# Altium PCB PCB1.PcbDoc (part 2 of 2)
Units mm, origin at the board's own origin, x right, y up, seen from the top; angles counter-clockwise.
Board outline 42.67 x 97.28 mm, 2 copper layers (Top Layer, Bottom Layer); 89 components, 66 nets, 314 pads, 101 vias.
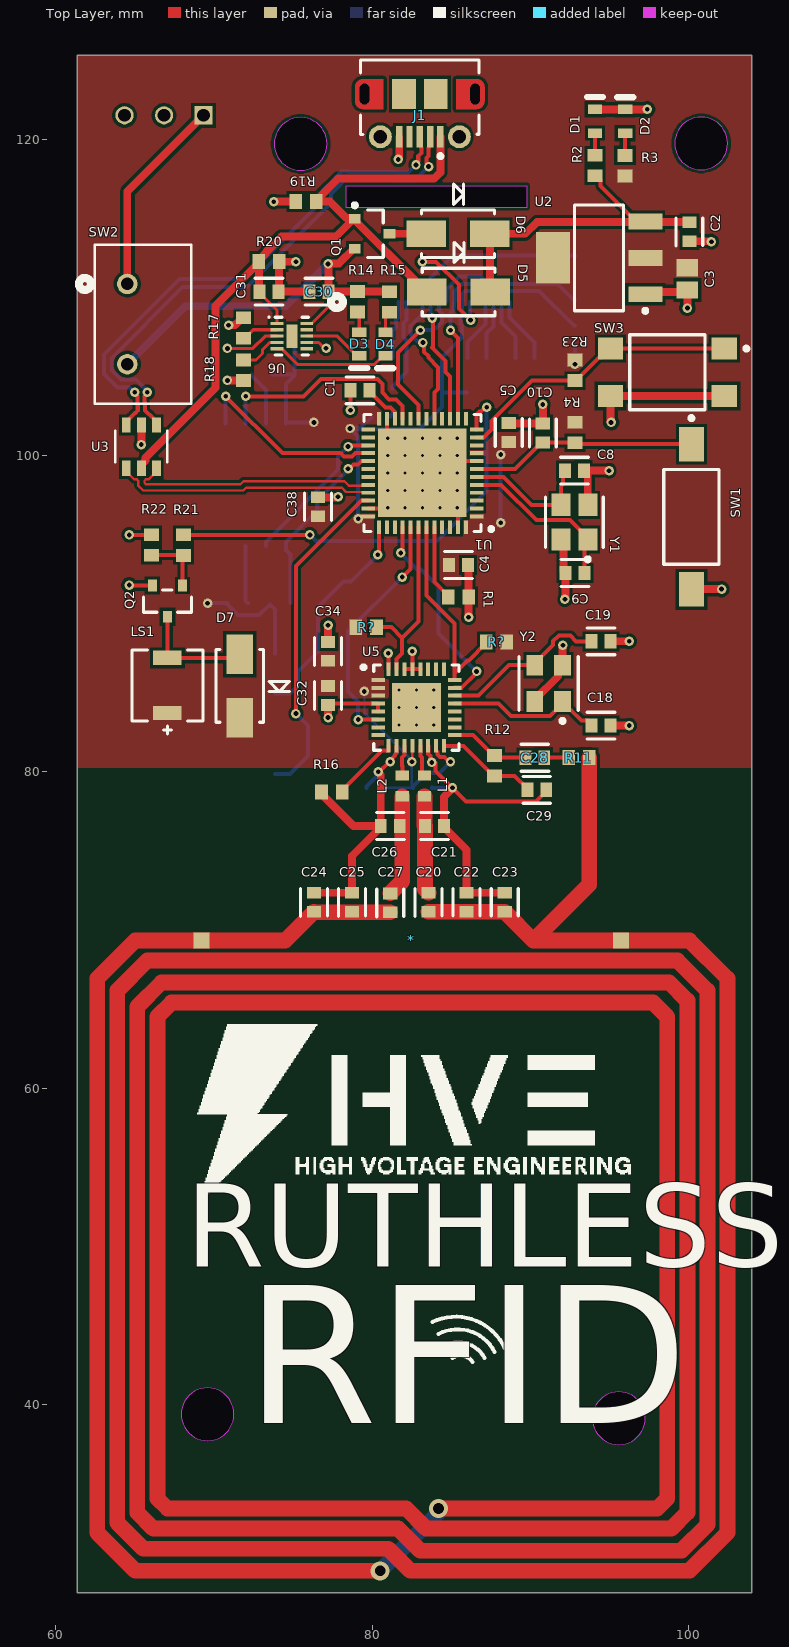
[diagram p0: Top Layer view]

## Polygon pours and split planes (outlines as drawn)
GND on Bottom Layer "GND_L02_P001" (solid, pour order 1): 61.341,80.264 61.341,125.349 104.013,125.349 104.013,80.264
3V3 on Top Layer "3V3_L01_P000" (solid, pour order 0): 61.341,80.264 61.341,125.349 104.013,125.349 104.013,80.264

## Silkscreen, mask and mechanical layers (free items; w line width, h text height)
Top Overlay:
  drawing of 35 lines, arcs and shapes, not listed
  text "RUTHLESS" at 68.207,46.944 h9
  text "RFID" at 72.023,35.907 h15

## Text inside footprints (layer, text, board x,y; h text height)
J1: Mechanical 1 "PCB EDGE" at 90.224,124.432 h0.3 r180
U3: Top 3D Body "*" at 65.583,101.397 h1.27 r270